# EAGLE board ac-ac-conv_v1.0 (EAGLE 7.3.0)
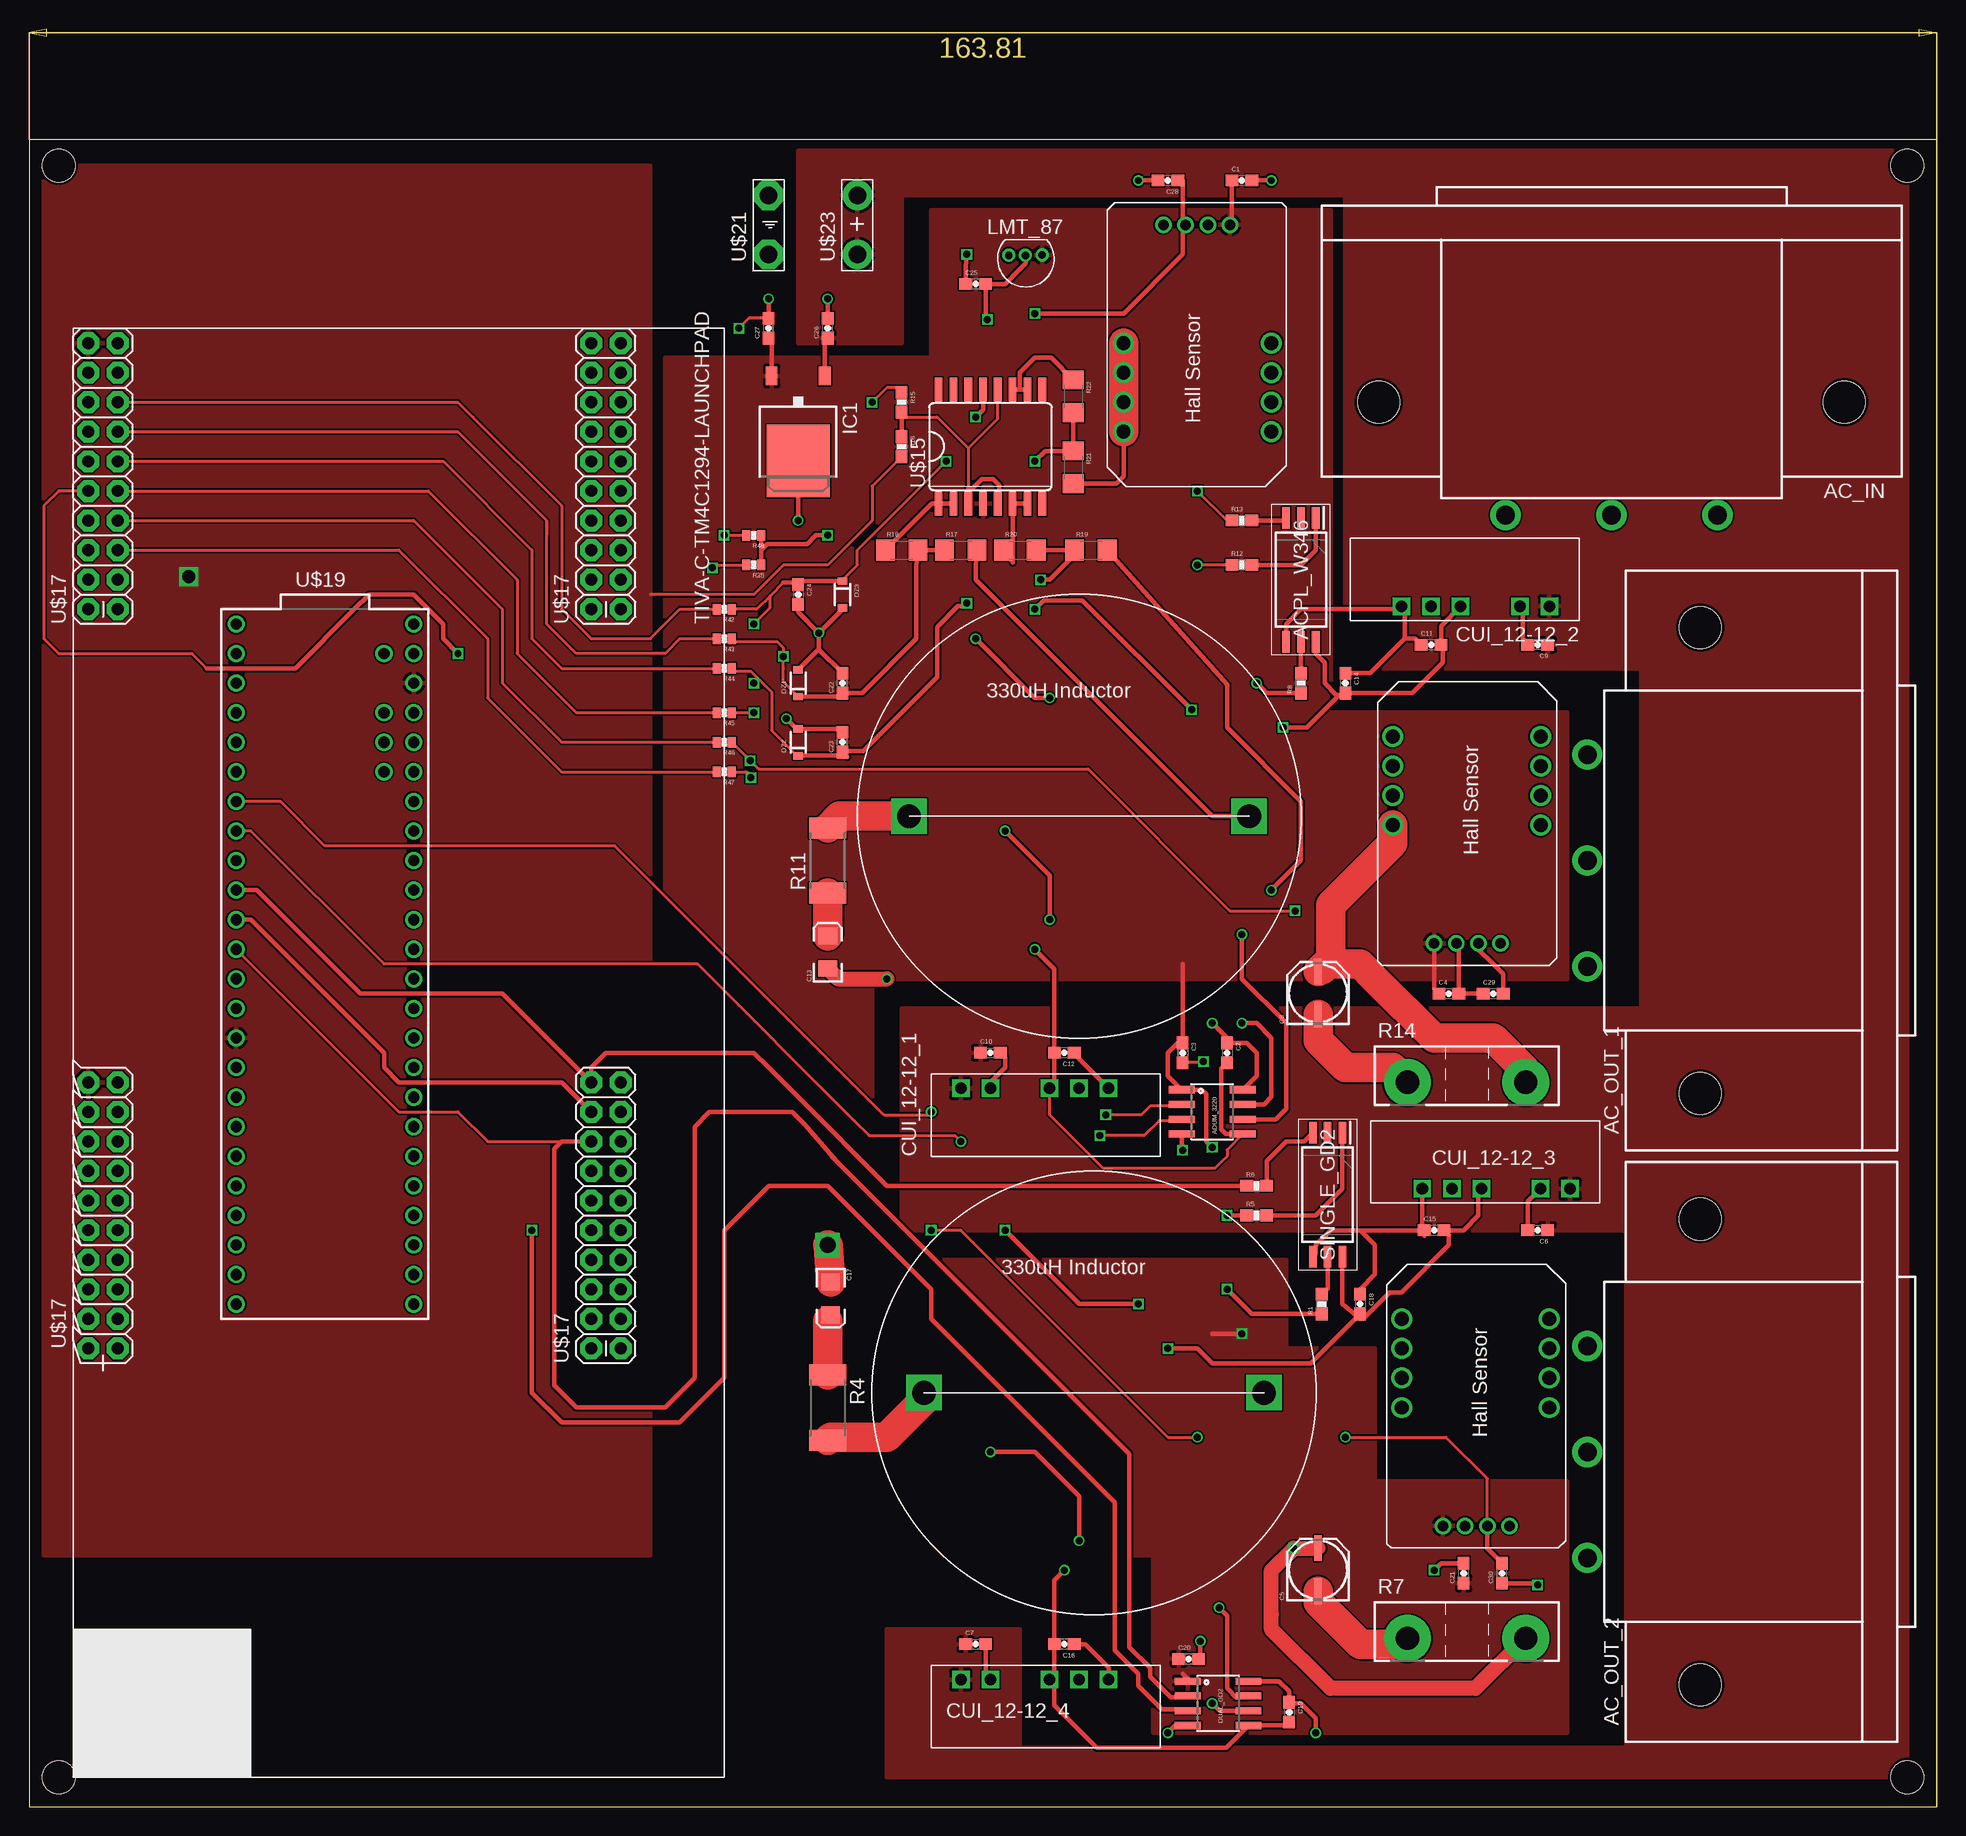
[diagram p0: board, top side]
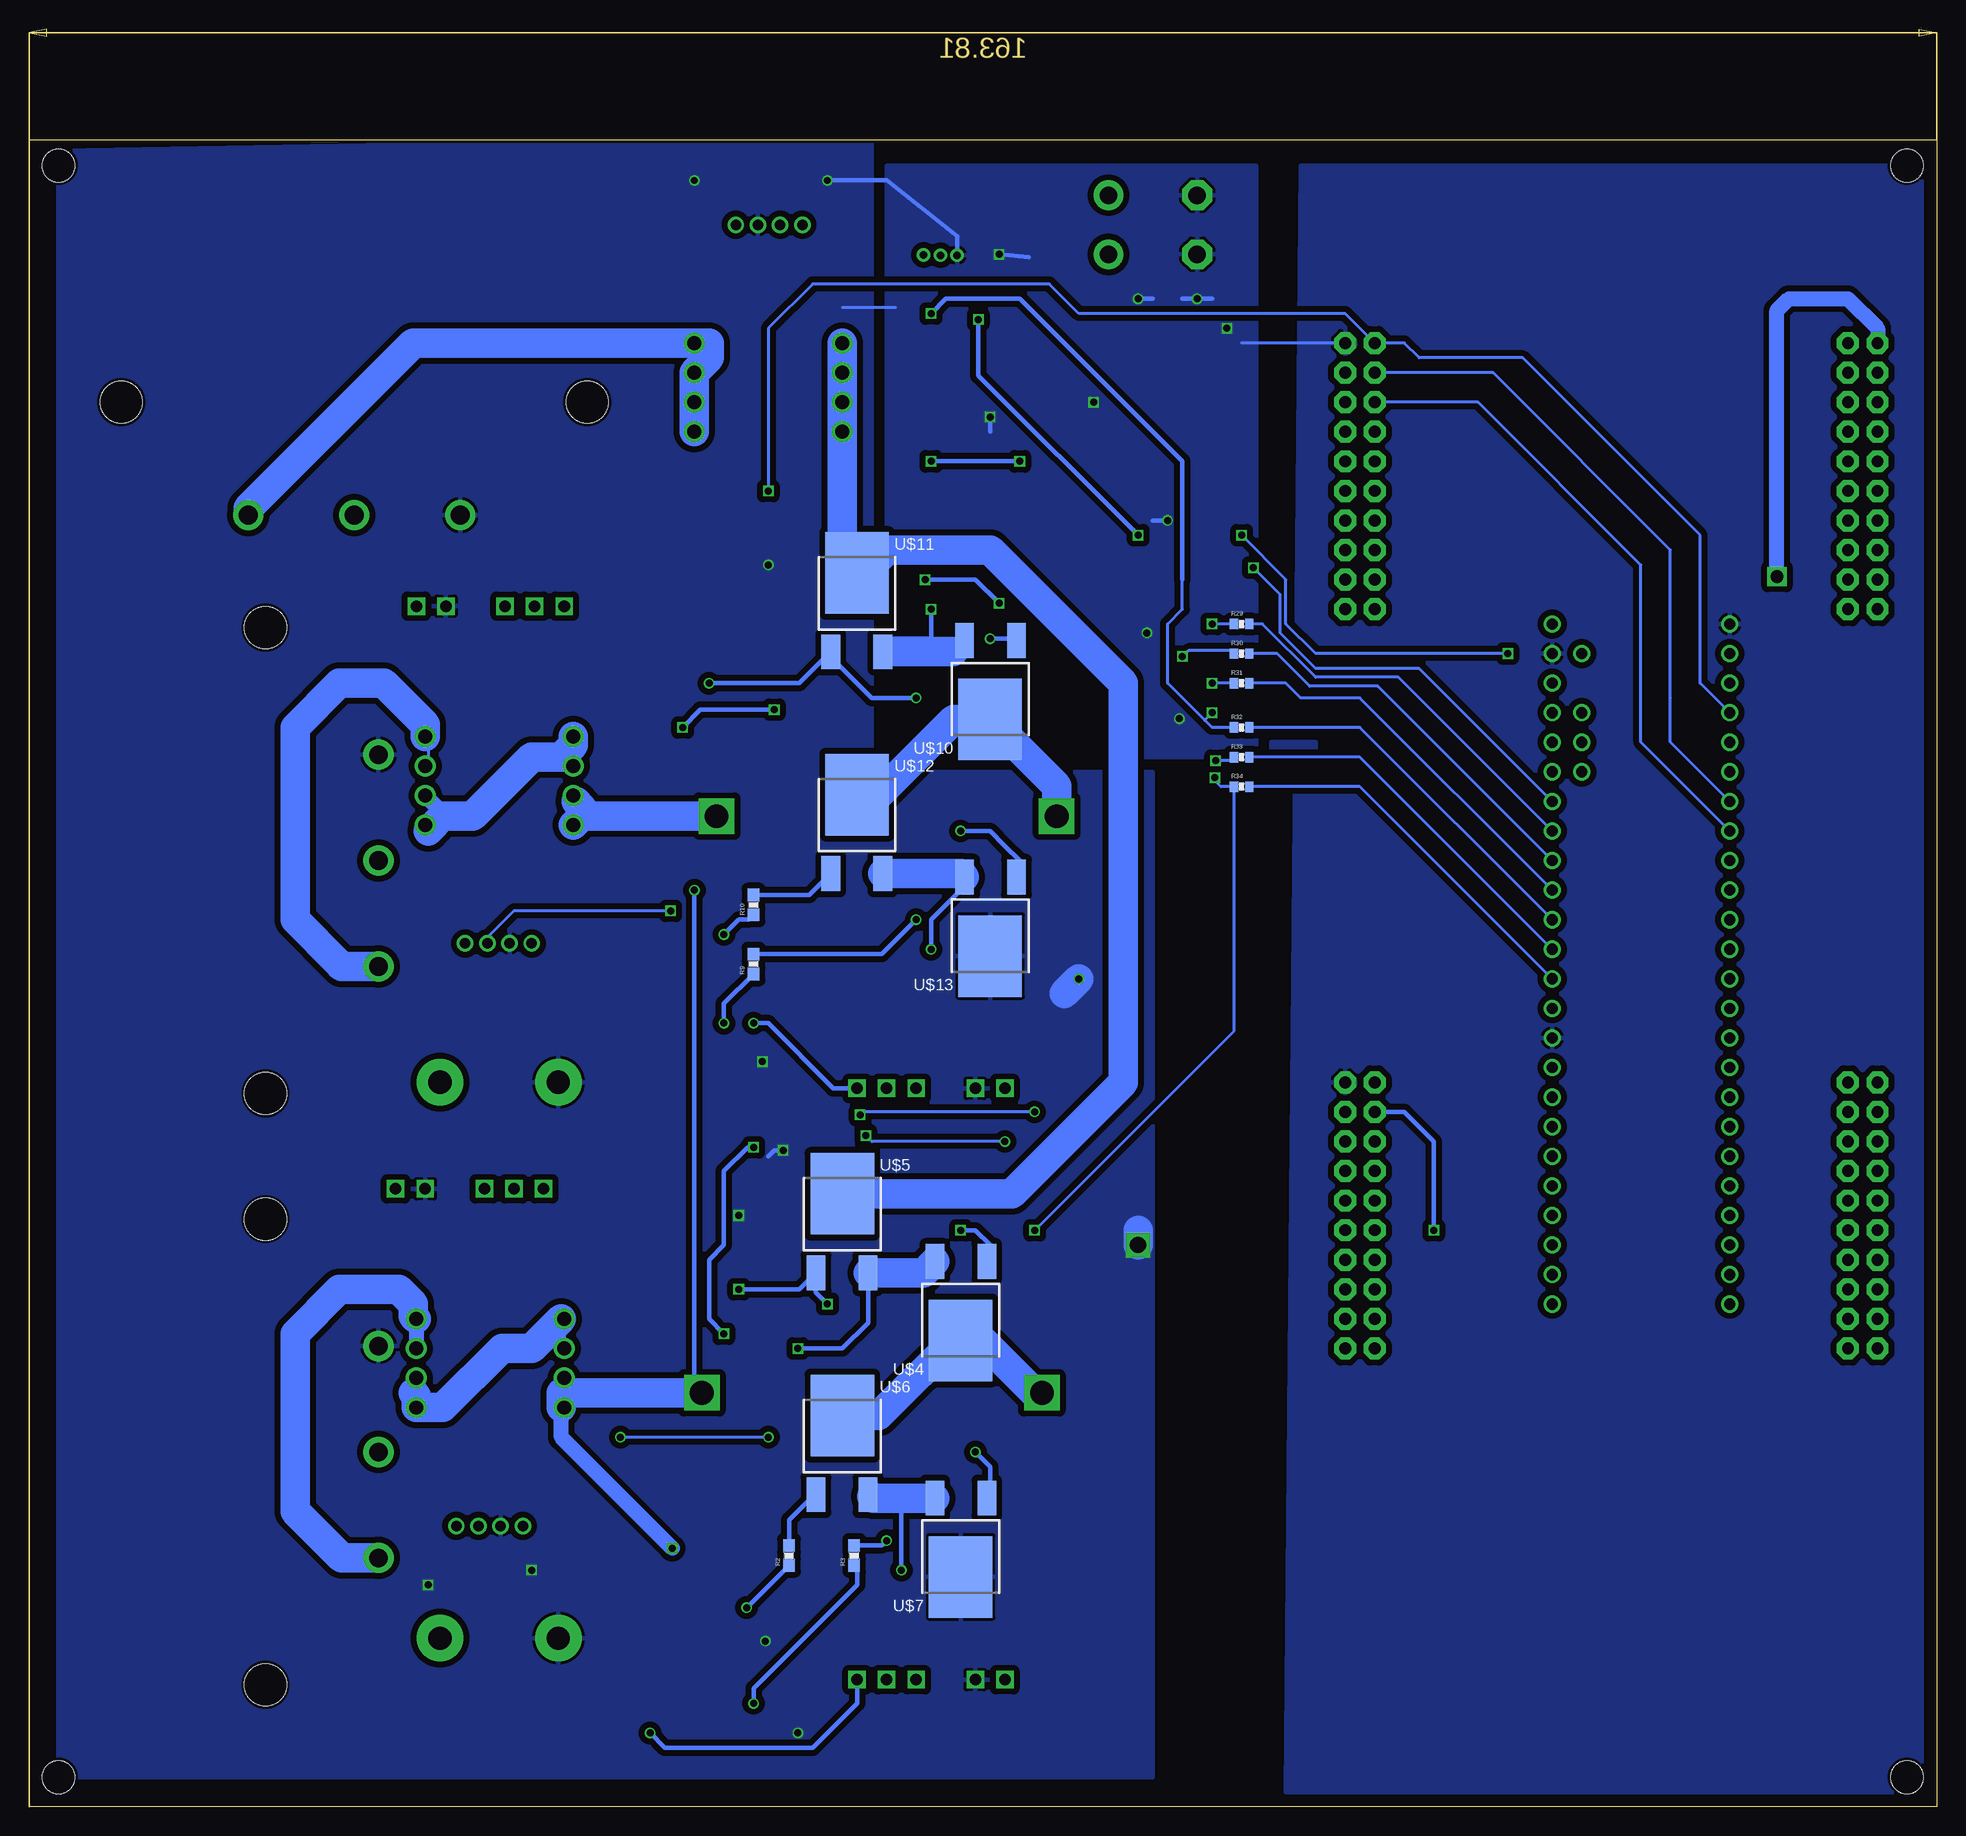
[diagram p1: board, bottom side, seen from below]

Size 163.81 x 143.18 mm. Coordinates in mm from the lower left corner, seen from the top.
Outline: 0,0 163.81,0 163.81,143.18 0,143.18 0,0
Copper layers (1*16): Top 0.035mm / dielectric 1.5mm / Bottom 0.035mm
Design rules "SeeedStudio_2layer_DRU_no_angle_20140221": minimum track width 6mil, minimum drill 12mil, track to track 6mil, track to pad 6mil, pad to pad 6mil, via to via 6mil, smd to smd 0mil, copper to edge 10mil, drill to drill 10mil, minimum pad ring 10mil, minimum via ring 6mil, stop-mask expansion 2mil, vias tented up to drill 100mil, thermal gap 10mil
Net classes: 1 Power: clearance 0.508 mm
Holes 2.8 mm at 161.29,140.97 161.29,2.54 2.54,2.54 2.54,140.97

## Footprints (pad centres in the part's own frame; a part is rotated, then mirrored left to right if it is on the bottom)
6ESRM-P = drill 1.6 pad 2.6: 1 -9.1,9.7; 2 0,9.7; 3 9.1,9.7 | hole 3.6: -20,0; 20,0
SSO-6 = smd 1.85 x 0.65: 1 -5.325,1.778; 2 -5.325,0.508; 3 -5.325,-0.762; 4 5.325,-0.762; 5 5.325,0.508; 6 5.325,1.778
SO08 = smd 0.61 x 2.21: 1 -1.905,-2.616; 2 -0.635,-2.616; 3 0.635,-2.616; 4 1.905,-2.616; 5 1.905,2.616; 6 0.635,2.616; 7 -0.635,2.616; 8 -1.905,2.616
0603-CAP = smd 1.1 x 1: 1 -0.85,0; 2 0.85,0
PANASONIC_C = smd 2.2 x 0.65: + 1.9,-0.2; - -1.8,-0.2
EIA3216 = smd 1.4 x 1.6: A 1.4,0; C -1.4,0
CUI_PDM2 = drill 0.991 square: 1 2.54,5.842; 2 5.08,5.842; 4 10.16,5.842; 5 12.7,5.842; 6 15.24,5.842
SOD-323 = smd 0.63 x 0.83: 1 -1.15,0; 2 1.15,0
F03P_THRU_HOLE = drill 0.9: GND 1.27,8.509; VCC 1.27,10.414; VOUT 1.27,6.604; VREF 1.27,4.699 | drill 1.2: IN2 11.43,13.97; IN3 13.97,13.97; IN4 16.51,13.97; IN5 19.05,13.97; OUT6 19.05,1.27; OUT7 16.51,1.27; OUT8 13.97,1.27; OUT9 11.43,1.27
TO252 = smd 1 x 1.6: 1 -2.28,-4.8; 2 2.28,-4.8 | smd 5.4 x 6.2: 3 0,2.5
BOUNRS_330UH = drill 2.032 square: P$1 14.605,0; P$2 -14.605,0
LMT87_TO = drill 0.635: GND 0.305,-1.346; OUT 1.727,-1.346; VDD 3.175,-1.321
0603-RES = smd 1.1 x 1: 1 -0.85,0; 2 0.85,0
R2512 = smd 1.8 x 3.2: 1 -2.8,0; 2 2.8,0
TO-247-2V = drill 2 pad 4: 1 -5.08,0; 2 5.08,0
1206 = smd 1.6 x 1.8: 1 -1.4,0; 2 1.4,0
0402-RES = smd 0.7 x 0.9: 1 -0.65,0; 2 0.65,0
DPAK = smd 1.6 x 2.997: 1 -2.261,-4.928; 3 2.21,-4.928 | smd 5.452 x 7: 4 0,1.853
SO16L = smd 0.66 x 2.032: 1 -4.445,-4.902; 2 -3.175,-4.902; 3 -1.905,-4.902; 4 -0.635,-4.902; 5 0.635,-4.902; 6 1.905,-4.902; 7 3.175,-4.902; 8 4.445,-4.902; 9 4.445,4.902; 10 3.175,4.902; 11 1.905,4.902; 12 0.635,4.902; 13 -0.635,4.902; 14 -1.905,4.902; 15 -3.175,4.902; 16 -4.445,4.902
TIVA-C-LP-BOOSTER-PACK = drill 1.016 pad 1.88 octagon: 1 36.83,52.07; 2 36.83,54.61; 3 39.37,52.07; 4 39.37,54.61; 5 41.91,52.07; 6 41.91,54.61; 7 44.45,52.07; 8 44.45,54.61; 9 46.99,52.07; 10 46.99,54.61; 11 49.53,52.07; 12 49.53,54.61; 13 52.07,52.07; 14 52.07,54.61; 15 54.61,52.07; 16 54.61,54.61; 17 57.15,52.07; 18 57.15,54.61; 19 59.69,52.07; 20 59.69,54.61; 21 36.83,8.89; 22 36.83,11.43; 23 39.37,8.89; 24 39.37,11.43; 25 41.91,8.89; 26 41.91,11.43; 27 44.45,8.89; 28 44.45,11.43; 29 46.99,8.89; 30 46.99,11.43; 31 49.53,8.89; 32 49.53,11.43; 33 52.07,8.89; 34 52.07,11.43; 35 54.61,8.89; 36 54.61,11.43; 37 57.15,8.89; 38 57.15,11.43; 39 59.69,8.89; 40 59.69,11.43; 41 100.33,8.89; 42 100.33,11.43; 43 102.87,8.89; 44 102.87,11.43; 45 105.41,8.89; 46 105.41,11.43; 47 107.95,8.89; 48 107.95,11.43; 49 110.49,8.89; 50 110.49,11.43; 51 113.03,8.89; 52 113.03,11.43; 53 115.57,8.89; 54 115.57,11.43; 55 118.11,8.89; 56 118.11,11.43; 57 120.65,8.89; 58 120.65,11.43; 59 123.19,8.89; 60 123.19,11.43; 61 100.33,52.07; 62 100.33,54.61; 63 102.87,52.07; 64 102.87,54.61; 65 105.41,52.07; 66 105.41,54.61; 67 107.95,52.07; 68 107.95,54.61; 69 110.49,52.07; 70 110.49,54.61; 71 113.03,52.07; 72 113.03,54.61; 73 115.57,52.07; 74 115.57,54.61; 75 118.11,52.07; 76 118.11,54.61; 77 120.65,52.07; 78 120.65,54.61; 79 123.19,52.07; 80 123.19,54.61
TEENSY_3.5_DIL+4 = drill 0.965: 0 -7.62,26.67; 1 -7.62,24.13; 2 -7.62,21.59; 3 -7.62,19.05; 3.3V 7.62,24.13; 3.3V3 -7.62,-6.35; 4 -7.62,16.51; 5 -7.62,13.97; 6 -7.62,11.43; 7 -7.62,8.89; 8 -7.62,6.35; 9 -7.62,3.81; 10 -7.62,1.27; 11 -7.62,-1.27; 12 -7.62,-3.81; 13 7.62,-3.81; 14/A0 7.62,-1.27; 15/A1 7.62,1.27; 16/A2 7.62,3.81; 17/A3 7.62,6.35; 18/A4 7.62,8.89; 19/A5 7.62,11.43; 20/A6 7.62,13.97; 21/A7 7.62,16.51; 22/A8 7.62,19.05; 23/A9 7.62,21.59; 24 -7.62,-8.89; 25 -7.62,-11.43; 26 -7.62,-13.97; 27 -7.62,-16.51; 28 -7.62,-19.05; 29 -7.62,-21.59; 30 -7.62,-24.13; 31/A12 -7.62,-26.67; 32/A13 -7.62,-29.21; 33/A14 7.62,-29.21; 34/A15 7.62,-26.67; 35/A16 7.62,-24.13; 36/A17 7.62,-21.59; 37/A18 7.62,-19.05; 38/A19 7.62,-16.51; 39/A20 7.62,-13.97; A10 5.08,19.05; A11 5.08,16.51; A21 7.62,-11.43; A22 7.62,-8.89; AGND 7.62,26.67; AREF 5.08,21.59; GND -7.62,29.21; GND1 7.62,-6.35; VIN 7.62,29.21; VUSB 5.08,26.67
SPADE-GROUND = drill 1.5 pad 2.54 octagon: P$1 0,-2.54; P$2 0,2.54
SPADE-POWER = drill 1.5 pad 2.54: P$1 0,-2.54; P$2 0,2.54

## Placement (x,y rotation side)
AC_IN  6ESRM-P  [6ESRM-P]  135.89,120.65 180 top
AC_OUT_1  6ESRM-P  [6ESRM-P]  143.51,81.28 90 top
AC_OUT_2  6ESRM-P  [6ESRM-P]  143.51,30.48 90 top
ACPL_W346  ACPL-W346-SSO6  [SSO-6]  108.71,105.41 270 top
ADUM_3220  ADUM3220  [SO08]  101.6,59.69 270 top
C1  0.1u  [0603-CAP]  104.14,139.7 0 top
C2  1u  [0603-CAP]  102.87,64.77 270 top
C3  0.1u  [0603-CAP]  99.06,64.77 270 top
C4  0.1u  [0603-CAP]  121.92,69.85 0 top
C5  10u  [PANASONIC_C]  110.49,20.32 90 top
C6  2.2u  [0603-CAP]  129.54,49.53 180 top
C7  2.2u  [0603-CAP]  81.28,13.97 0 top
C8  10u  [PANASONIC_C]  110.49,69.85 90 top
C9  2.2u  [0603-CAP]  129.54,99.82 180 top
C10  2.2u  [0603-CAP]  82.55,64.77 0 top
C11  2.2u  [0603-CAP]  120.4,99.82 0 top
C12  2.2u  [0603-CAP]  88.9,64.77 180 top
C13  10n  [EIA3216]  68.58,73.41 90 top
C14  1u  [0603-CAP]  113.03,96.52 270 top
C15  2.2u  [0603-CAP]  120.65,49.53 0 top
C16  2.2u  [0603-CAP]  88.9,13.97 180 top
C17  1n  [EIA3216]  68.83,43.69 270 top
C18  1u  [0603-CAP]  114.3,43.18 270 top
C19  1u  [0603-CAP]  108.2,8.13 270 top
C20  0.1u  [0603-CAP]  99.57,12.7 0 top
C21  0.1u  [0603-CAP]  123.19,20.07 90 top
C22  0.1u  [0603-CAP]  69.85,96.52 90 top
C23  0.1u  [0603-CAP]  69.85,91.44 90 top
C24  0.1u  [0603-CAP]  66.04,104.14 270 top
C25  0.1u  [0603-CAP]  81.28,130.81 0 top
C26  0.1u  [0603-CAP]  68.58,127 90 top
C27  0.1u  [0603-CAP]  63.5,127 90 top
C28  0.1u  [0603-CAP]  97.79,139.7 180 top
C29  0.1u  [0603-CAP]  125.73,69.85 0 top
C30  0.1u  [0603-CAP]  126.49,20.07 90 top
CUI_12-12_1  CUI-S12-S12  [CUI_PDM2]  77.47,55.88 0 top
CUI_12-12_2  CUI-S12-S12  [CUI_PDM2]  133.1,108.97 180 top
CUI_12-12_3  CUI-S12-S12  [CUI_PDM2]  134.87,58.93 180 top
CUI_12-12_4  CUI-S12-S12  [CUI_PDM2]  77.47,5.08 0 top
DUAL_GD2  ADUM3220  [SO08]  102.11,8.89 270 top
DZ1  DIODE-ZENER-BZT52  [SOD-323]  66.04,96.52 90 top
DZ2  DIODE-ZENER-BZT52  [SOD-323]  66.04,91.44 90 top
DZ3  DIODE-ZENER-BZT52  [SOD-323]  69.85,104.14 270 top
I_SENSE_1  F03PS05  [F03P_THRU_HOLE]  92.71,137.16 270 top
I_SENSE_2  F03PS05  [F03P_THRU_HOLE]  131.06,72.9 90 top
I_SENSE_3  F03PS05  [F03P_THRU_HOLE]  131.83,22.86 90 top
IC1  7805DT  [TO252]  66.04,118.11 180 top
L1  L330UH  [BOUNRS_330UH]  91.44,35.56 180 top
L2  L330UH  [BOUNRS_330UH]  90.17,85.09 180 top
LMT_87  LMT87_PAC  [LMT87_TO]  83.82,134.62 0 top
R1  100  [0603-RES]  111,43.18 90 top
R2  [0603-RES]  98.55,21.59 90 bottom
R3  [0603-RES]  92.96,21.59 90 bottom
R4  10k  [R2512]  68.58,34.29 270 top
R5  100  [0603-RES]  105.41,50.8 0 top
R6  330  [0603-RES]  105.41,53.34 0 top
R7  50  [TO-247-2V]  123.44,14.48 0 top
R8  100  [0603-RES]  109.22,96.52 90 top
R9  100  [0603-RES]  101.6,72.39 90 bottom
R10  100  [0603-RES]  101.6,77.47 90 bottom
R11  100k  [R2512]  68.58,81.28 90 top
R12  100  [0603-RES]  104.14,106.68 0 top
R13  330  [0603-RES]  104.14,110.49 0 top
R14  50  [TO-247-2V]  123.44,62.23 0 top
R15  10k  [0603-RES]  74.93,120.65 270 top
R16  10k  [0603-RES]  74.93,116.84 270 top
R17  100k  [1206]  80.01,107.95 0 top
R18  1.2k  [1206]  74.93,107.95 0 top
R19  100k  [1206]  91.19,107.95 0 top
R20  1.2k  [1206]  85.09,107.95 0 top
R21  100k  [1206]  89.66,115.06 270 top
R22  1.2k  [1206]  89.66,121.16 270 top
R29  [0402-RES]  59.69,101.6 0 bottom
R30  [0402-RES]  59.69,99.06 0 bottom
R31  [0402-RES]  59.69,96.52 0 bottom
R32  [0402-RES]  59.69,92.71 0 bottom
R33  [0402-RES]  59.69,90.17 0 bottom
R34  [0402-RES]  59.69,87.63 0 bottom
R35  [0402-RES]  62.23,106.68 180 top
R42  [0402-RES]  59.69,102.87 180 top
R43  [0402-RES]  59.69,100.33 180 top
R44  [0402-RES]  59.69,97.79 180 top
R45  [0402-RES]  59.69,93.98 180 top
R46  [0402-RES]  59.69,91.44 180 top
R47  [0402-RES]  59.69,88.9 180 top
R48  [0402-RES]  62.23,109.22 180 top
SINGLE_GD2  ACPL-W346-SSO6  [SSO-6]  111,52.58 270 top
U$4  IPD60R280P  [DPAK]  83.82,41.91 180 bottom
U$5  IPD60R280P  [DPAK]  93.98,50.8 0 bottom
U$6  IPD60R280P  [DPAK]  93.98,31.75 0 bottom
U$7  IPD60R280P  [DPAK]  83.82,21.59 180 bottom
U$10  IPD60R280P  [DPAK]  81.28,95.25 180 bottom
U$11  IPD60R280P  [DPAK]  92.71,104.14 0 bottom
U$12  IPD60R280P  [DPAK]  92.71,85.09 0 bottom
U$13  IPD60R280P  [DPAK]  81.28,74.93 180 bottom
U$15  LT1014  [SO16L]  82.55,116.84 0 top
U$17  TM4C1294_SHIELD  [TIVA-C-LP-BOOSTER-PACK]  59.69,2.54 90 top
U$19  TEENSY_3.5_DIL+4  [TEENSY_3.5_DIL+4]  25.4,72.39 0 top
U$21  SPADE-GROUND  [SPADE-GROUND]  63.5,135.89 0 top
U$23  SPADE-POWER  [SPADE-POWER]  71.12,135.89 0 top

## Library data of the parts
AC_IN AC_OUT_1 AC_OUT_2 = con-tycoelectronics; MF: TYCO ELECTRONICS; MPN: 6ESRM-P; OC_FARNELL: unknown; OC_NEWARK: 87F1821
ACPL_W346 ADUM_3220 CUI_12-12_1-CUI_12-12_4 DUAL_GD2 I_SENSE_1-I_SENSE_3 L1 L2 SINGLE_GD2 U$4-U$7 U$10-U$13 U$17 = Francis-Project
C1-C30 DZ1-DZ3 R1-R3 R5 R6 R8-R10 R12 R13 R15-R22 R29-R35 R42-R48 = SparkFun
IC1 = linear
LMT_87 = nick
R4 R11 = SparkFun-Passives
R7 R14 = resistor-power; OC_FARNELL: unknown; OC_NEWARK: unknown
U$15 = SparkFun-AnalogIC
U$19 = Teensy_3_and_LC_Series_Boards_v1.4
U$21 U$23 = Spade-terminals

## Nets
1V6: R15.2 R16.1 U$15.3 U$15.5 U$15.12
3V3: R16.2 U$17.20 U$17.80 U$19.3.3V U$19.3.3V3
5V: ADUM_3220.1 C1.1 C3.1 C4.1 C20.1 C21.1 C27.1 DUAL_GD2.1 I_SENSE_1.VCC I_SENSE_2.VCC I_SENSE_3.VCC IC1.2 LMT_87.VDD U$15.4
+12V: C6.1 C7.1 C9.1 C10.1 C26.1 CUI_12-12_1.1 CUI_12-12_2.1 CUI_12-12_3.1 CUI_12-12_4.1 IC1.1 U$23.P$1 U$23.P$2
+IN: U$15.14
-IN: U$15.15
AREF: U$19.AREF
GND [Power]: AC_IN.3 AC_OUT_1.3 AC_OUT_2.3 ADUM_3220.4 C1.2 C3.2 C4.2 C5.- C6.2 C7.2 C8.- C9.2 C10.2 C13.C C17.C C20.2 C21.2 C22.2 C23.2 C24.2 C25.1 C26.2 C27.2 C28.2 C29.1 C30.1 CUI_12-12_1.2 CUI_12-12_2.2 CUI_12-12_3.2 CUI_12-12_4.2 DUAL_GD2.4 DZ1.2 DZ2.2 DZ3.2 I_SENSE_1.GND I_SENSE_2.GND I_SENSE_3.GND IC1.3 LMT_87.GND R5.1 R7.1 R12.1 R14.1 R15.1 U$7.4 U$13.4 U$15.13 U$17.39 U$17.59 U$19.AGND U$19.GND U$19.GND1 U$21.P$1 U$21.P$2
HI_G1 [Power]: R8.1 U$10.1 U$11.1
HI_G2: R1.1 U$4.1 U$5.1
HI_PS1: ACPL_W346.4 C11.1 C14.1 CUI_12-12_2.6
HI_PS2: C15.1 C18.1 CUI_12-12_3.6 SINGLE_GD2.4
HI_S1: ACPL_W346.6 C11.2 C14.2 CUI_12-12_2.4 U$10.3 U$11.3
HI_S2 [Power]: C15.2 C18.2 CUI_12-12_3.4 SINGLE_GD2.6 U$4.3 U$5.3
I_APP1: C29.2 I_SENSE_2.VOUT R33.1 R46.1
I_APP2: C30.2 I_SENSE_3.VOUT R34.1 R47.1
I_MAIN: C28.1 I_SENSE_1.VOUT R32.1 R45.1
LO_G1+: R9.2 U$13.1
LO_G1-: R10.2 U$12.1
LO_G2+: R3.2 U$7.1
LO_G2-: R2.2 U$6.1
LO_PS1: ADUM_3220.8 C2.1 C12.1 CUI_12-12_1.6
LO_PS2: C16.1 C19.1 CUI_12-12_4.6 DUAL_GD2.8
LO_S1 [Power]: ADUM_3220.5 C2.2 C12.2 CUI_12-12_1.4 U$12.3 U$13.3
LO_S2 [Power]: C16.2 C19.2 CUI_12-12_4.4 DUAL_GD2.5 U$6.3 U$7.3
N$1 [Power]: AC_IN.1 I_SENSE_1.IN2 I_SENSE_1.IN3 I_SENSE_1.IN4 I_SENSE_1.IN5
N$2 [Power]: I_SENSE_2.IN4 I_SENSE_2.IN5 I_SENSE_2.OUT8 I_SENSE_2.OUT9
N$3 [Power]: I_SENSE_3.IN4 I_SENSE_3.IN5 I_SENSE_3.OUT8 I_SENSE_3.OUT9
N$4 [Power]: AC_OUT_1.1 I_SENSE_2.OUT6 I_SENSE_2.OUT7
N$5 [Power]: L1.P$1 R4.2 U$4.4 U$6.4
N$6 [Power]: C17.A R4.1
N$7: R5.2 SINGLE_GD2.1
N$8: R6.2 SINGLE_GD2.3
N$9 [Power]: L2.P$1 R11.2 U$10.4 U$12.4
N$10 [Power]: AC_OUT_2.1 I_SENSE_3.OUT6 I_SENSE_3.OUT7
N$11 [Power]: C13.A R11.1
N$12: ACPL_W346.1 R12.2
N$13: ACPL_W346.3 R13.2
N$14 [Power]: ADUM_3220.7 R9.1
N$15: R18.1 U$15.1 U$15.2
N$16: R34.2 U$19.14/A0
N$17: R22.1 U$15.10 U$15.11
N$18: R33.2 U$19.15/A1
N$19: R20.1 U$15.6 U$15.7
N$20: R32.2 U$19.16/A2
N$21: R31.2 U$19.17/A3
N$23 [Power]: ADUM_3220.6 R10.1
N$24 [Power]: DUAL_GD2.7 R2.1
N$25: R30.2 U$19.18/A4
N$26 [Power]: DUAL_GD2.6 R3.1
N$27: R29.2 U$19.19/A5
N$41: R35.2 U$19.20/A6
N$55: R42.2 U$17.75
N$56: R43.2 U$17.73
N$57: R44.2 U$17.71
N$58: R45.2 U$17.69
N$59: R46.2 U$17.67
N$60: R47.2 U$17.65
N$61: R48.2 U$17.70
OUT: U$15.16
PWM_H1: R13.1 U$17.60 U$19.2
PWM_H2: R6.1 U$17.40 U$19.8
PWM_L1+: ADUM_3220.2 U$17.58 U$19.5
PWM_L1-: ADUM_3220.3 U$17.56 U$19.6
PWM_L2+: DUAL_GD2.3 U$17.38 U$19.9
PWM_L2-: DUAL_GD2.2 U$17.36 U$19.10
TEMP: C25.2 LMT_87.OUT R35.1 R48.1
V_APP1: C22.1 DZ1.1 R17.1 R18.2 R30.1 R43.1
V_APP2: C23.1 DZ2.1 R19.1 R20.2 R31.1 R44.1
V_MAIN: C24.1 DZ3.1 R21.1 R22.2 R29.1 R42.1
VBUS [Power]: I_SENSE_1.OUT6 I_SENSE_1.OUT7 I_SENSE_1.OUT8 I_SENSE_1.OUT9 R21.2 U$5.4 U$11.4
VIN: U$19.VIN
VOUT1 [Power]: C8.+ I_SENSE_2.IN2 I_SENSE_2.IN3 L2.P$2 R14.2 R17.2
VOUT2 [Power]: C5.+ I_SENSE_3.IN2 I_SENSE_3.IN3 L1.P$2 R7.2 R19.2
VOUT_H1: R1.2 SINGLE_GD2.5
VOUT_H2: ACPL_W346.5 R8.2
VUSB: U$19.VUSB

## Tracks (layer width: path | path; a pad name or v marks a point on that pad's centre or on a via)
1V6
  Top 0.254: R15.2 75.35,119.38 77.98,119.38 80.64,116.71 | 80.64,116.71 80.64,113.28 U$15.3 | 80.64,116.71 83.19,119.25 U$15.12
  Top 0.406: R16.1 R15.2 | U$15.5 83.31,112.06 83.31,113.54 82.8,114.05 81.79,114.05 81.03,113.28 80.64,113.28
3V3  (via drill 1.1)
  Top 0.254: R16.2 72.39,113.45 72.39,110.49 68.58,106.68 64.77,106.68 62.23,104.14 53.34,104.14
  Bottom 1.27: v13.72,105.66 13.72,128.52 12.7,129.54 7.62,129.54 5.08,127 U$17.80
  pour Top: 1.27,140.97 53.34,140.97 53.34,21.59 1.27,21.59
5V  (via drill 0.6)
  Top 0.406: I_SENSE_1.VCC 102.87,136.14 103.29,136.56 C1.1 | IC1.2 63.76,125.89 C27.1 | I_SENSE_2.VCC 120.65,70.27 C4.1 | DUAL_GD2.1 99.49,11 | 99.49,11 99.06,11.43 99.49,11 | 99.06,72.39 C3.1 98.64,65.62 97.79,64.77 97.79,62.79 ADUM_3220.1 100.71,61.59 101.09,61.21 101.09,57.15 v101.6,56.64 | v104.14,40.64 101.6,40.64
  Bottom 0.406: v101.6,56.64 102.11,56.64 104.14,54.61 104.14,48.26 105.41,46.99 105.41,41.91 v104.14,40.64
  pour Top: 54.61,124.46 77.47,124.46 77.47,137.16 111.76,137.16 111.76,93.98 132.08,93.98 132.08,71.12 72.39,71.12 72.39,46.99 107.95,46.99 107.95,39.37 115.57,39.37 115.57,27.94 132.08,27.94 132.08,6.35 96.52,6.35 96.52,21.59 54.61,21.59
+12V
  Top 0.406: IC1.1 68.32,125.89 C26.1
  pour Top: 113.03,138.43 113.03,97.79 138.43,97.79 138.43,68.58 74.93,68.58 74.93,49.53 137.16,49.53 137.16,5.08 85.09,5.08 85.09,15.24 73.66,15.24 73.66,2.54 161.29,2.54 161.29,142.24 66.04,142.24 66.04,125.73 74.93,125.73 74.93,138.43
GND  (via drill 0.6, 1.4)
  Top 0.254: R15.1 74.51,121.92 73.66,121.92 v72.39,120.65 | v100.84,64.01 100.75,63.92 C3.2 | R12.1 101.6,106.68 v100.33,106.68 | C27.2 61.81,127.85 v60.96,127
  Top 0.406: C21.2 121.25,20.92 v120.65,20.32 | C30.1 129.37,19.22 v129.54,19.05 | C27.2 v63.5,129.54 | C26.2 v68.58,129.54 | IC1.3 v66.04,110.49 | C9.2 128.69,99.91 128.27,100.33 128.27,102.87 CUI_12-12_2.2 | I_SENSE_2.GND 122.77,73.95 C4.2 C29.1 | C6.2 128.69,51.98 CUI_12-12_3.2 | CUI_12-12_4.2 82.13,11.34 C7.2 | C20.2 100.58,13.21 v100.58,14.22 | DUAL_GD2.4 98.42,6.99 v97.79,6.35 | CUI_12-12_1.2 82.55,62.23 83.82,63.5 83.82,64.35 C10.2 | C25.1 80.43,132.25 v80.52,133.35 | U$15.13 81.92,120.02 v81.28,119.38 | 118.11,15.24 118.36,14.99 R7.1 118.11,14.22 118.11,13.97 | ADUM_3220.4 98.98,56.46 v99.06,56.39 | R5.1 v102.87,50.8 | DZ3.2 69.85,102.87 v67.82,100.84 | C24.2 66.04,102.62 v67.82,100.84 | DZ1.2 67.82,99.45 67.82,100.33 | 67.82,100.33 v67.82,100.84 | C22.2 67.82,99.4 67.82,100.33 | C23.2 69.55,92.59 DZ2.2 65.91,92.59 v65.02,93.47 65.02,93.61 | C28.2 v95.25,139.7 | C1.2 v106.68,139.7
  Top 1.27: C13.C 69.47,71.12 v73.66,71.12
  Top 2.54: C5.- 110.69,17.58 114.3,13.97 118.11,13.97 | C8.- 110.69,65.84 113.03,63.5 117.09,63.5 R14.1 | C17.C 68.63,48.21 v68.58,48.26
  Bottom 0.254: U$17.59 59.69,125.73 | 89.41,128.78 93.98,128.78
  Bottom 0.406: LMT_87.GND 84.12,134.93 90.17,139.7 v95.25,139.7 | 64.77,129.54 v63.5,129.54 62.23,129.54 | v68.58,129.54 67.31,129.54 | v66.04,110.49 67.31,110.49 | v100.58,14.22 100.58,14.48 | v80.52,133.35 77.98,133.1 | v81.28,119.38 81.28,118.11 | v99.06,56.39 99.82,56.39 100.33,55.88
  Bottom 2.54: v68.58,48.26 68.58,49.53 | v73.66,71.12 74.93,69.85
  pour Bottom: 67.31,88.9 91.44,88.9 91.44,143.51 161.29,142.24 161.29,2.54 67.31,2.54
  pour Bottom: 58.42,140.97 90.17,140.97 90.17,99.06 73.66,99.06 73.66,90.17 58.42,90.17
  pour Bottom: 1.27,140.97 54.61,140.97 55.88,1.27 1.27,1.27
  pour Bottom: 57.15,91.44 53.34,91.44 53.34,90.17 57.15,90.17
HI_G1  (via drill 0.6)
  Top 0.406: R8.1 106.26,95.67 v105.41,96.52 | v87.63,95.25 86.36,95.25 v81.28,100.33
  Bottom 0.406: v105.41,96.52 97.66,96.52 U$11.1 94.97,98.78 91.44,95.25 v87.63,95.25 | v81.28,100.33 79.17,100.33 U$10.1
HI_G2  (via drill 0.6)
  Top 0.406: R1.1 104.99,42.33 v102.87,44.45 | v95.25,43.18 90.17,43.18 v83.82,49.53
  Bottom 0.406: v102.87,44.45 97.66,44.45 U$5.1 96.24,44.17 v95.25,43.18 | v83.82,49.53 82.55,49.53 81.28,48.26 81.28,47.12 U$4.1
HI_PS1
  Top 0.406: C14.1 115.15,97.37 118.11,100.33 | 118.11,100.33 119.04,100.33 C11.1 | 118.11,100.33 118.11,102.87 CUI_12-12_2.6 117.6,102.87 109.22,102.87 107.95,101.6 ACPL_W346.4
HI_PS2
  Top 0.406: CUI_12-12_3.6 119.63,49.7 C15.1 | C15.1 114.3,49.53 | 114.3,49.53 111.76,49.53 110.49,48.26 110.49,47.51 SINGLE_GD2.4 | 119.8,49.02 C15.1 | C18.1 114.3,44.45 115.57,45.72 115.57,48.26 114.3,49.53
HI_S1  (via drill 0.6)
  Top 0.406: CUI_12-12_2.4 121.25,101.43 C11.2 121.41,99.66 121.41,98.3 118.78,95.67 C14.2 112.86,95.5 112.52,95.5 | ACPL_W346.6 110.49,99.06 111.25,98.3 111.25,96.52 112.27,95.5 112.52,95.5 | v86.36,102.87 87.12,103.63 90.42,103.63 v99.82,94.23 | v107.7,92.71 109.73,92.71 112.52,95.5
  Bottom 0.254: 89.92,99.31 90.4,99.31 U$11.3 | 84.45,99.21 U$10.3
  Bottom 0.406: U$11.3 89.38,100.33 86.36,100.33 v86.36,102.87 | v99.82,94.23 106.17,94.23 v107.7,92.71
  Bottom 2.54: 84.45,99.21 89.81,99.21 89.92,99.31
HI_S2  (via drill 0.6)
  Top 0.406: CUI_12-12_3.4 124.46,52.83 124.46,50.8 123.19,49.53 C15.2 121.92,49.11 121.92,48.26 117.86,44.2 116.84,44.2 114.55,41.91 114.3,41.91 | SINGLE_GD2.6 112.78,47 112.78,43.18 114.3,41.91 | 114.3,41.91 114.72,42.33 114.47,42.33 | 114.47,42.33 C18.2 | 114.47,42.33 C18.2 | v97.79,39.37 100.33,39.37 101.6,38.1 110.07,38.1 C18.2 | 114.47,42.33 114.47,42.08 114.3,41.91
  Bottom 0.406: U$5.3 91.77,41.58 93.98,39.37 v97.79,39.37
  Bottom 2.54: U$5.3 87,45.87 U$4.3
I_APP1  (via drill 0.6)
  Top 0.254: R46.1 v61.92,89.86 | v61.92,89.86 62.55,89.22 | 62.55,89.22 62.63,89.15 90.93,89.15 103.12,76.96 v108.71,76.96 | v61.92,89.86 62.55,89.22
  Top 0.406: C29.2 126.58,71.54 125.73,72.39 124.46,73.66 I_SENSE_2.VOUT
  Bottom 0.254: v108.71,76.96 122.17,76.96 124.46,74.68 I_SENSE_2.VOUT | R33.1 60.65,89.86 v61.92,89.86
I_APP2  (via drill 0.6)
  Top 0.254: I_SENSE_3.VOUT 125.22,28.19 121.67,31.75 v113.03,31.75 | v77.47,49.53 80.01,49.53 97.79,31.75 v100.33,31.75 | R47.1 61.47,88.9 arc-90 v61.98,88.39
  Top 0.406: I_SENSE_3.VOUT 125.22,22.19 C30.2
  Bottom 0.254: v77.47,49.53 60.34,66.66 R34.1 61.47,87.63 61.98,88.14 v61.98,88.39 | v100.33,31.75 v113.03,31.75
I_MAIN  (via drill 0.6)
  Top 0.254: R45.1 v62.23,93.98
  Top 0.406: I_SENSE_1.VOUT 99.06,136.14 | 99.06,136.14 99.06,139.7 C28.1 | 99.06,136.14 99.06,133.35 93.98,128.27 v86.36,128.27
  Bottom 0.254: R32.1 62.23,92.71 62.87,93.34 | 62.87,93.34 66.04,96.52 66.04,101.6 64.77,102.87 64.77,105.41 | v62.23,93.98 62.87,93.34
  Bottom 0.406: v86.36,128.27 85.09,129.54 83.82,129.54 78.74,129.54 64.77,115.57 64.77,105.41
LO_G1+  (via drill 0.6)
  Top 0.406: v87.63,76.2 87.63,80.01 v83.82,83.82
  Bottom 0.406: R9.2 90.59,73.24 v87.63,76.2 | v83.82,83.82 81.28,83.82 80.01,82.55 78.74,81.28 78.74,80.14 U$13.1
LO_G1-
  Bottom 0.406: R10.2 96.81,78.32 U$12.1
LO_G2+  (via drill 0.6)
  Top 0.406: v90.17,22.86 90.17,26.67 86.36,30.48 v82.55,30.48
  Bottom 0.406: R3.2 90.59,22.44 v90.17,22.86 | v82.55,30.48 81.28,29.21 81.28,26.8 U$7.1
LO_G2-
  Bottom 0.406: R2.2 98.55,24.64 96.52,26.67 96.39,26.67 U$6.1
LO_PS1  (via drill 0.6)
  Top 0.406: ADUM_3220.8 105.41,62.79 105.41,64.77 104.56,65.62 C2.1 102.87,66.04 v101.6,67.31 | C12.1 89.75,64.68 CUI_12-12_1.6
  Bottom 0.406: CUI_12-12_1.6 94.74,61.72 100.33,67.31 v101.6,67.31
LO_PS2  (via drill 0.6)
  Top 0.406: C16.1 90.68,13.97 92.71,11.94 CUI_12-12_4.6 | DUAL_GD2.8 107.31,10.79 108.2,9.91 C19.1 108.29,8.89 109.22,8.89 110.49,7.62 v110.49,6.35
  Bottom 0.406: CUI_12-12_4.6 92.71,8.89 96.52,5.08 109.22,5.08 v110.49,6.35
LO_S1  (via drill 0.6)
  Top 0.254: ADUM_3220.5 102.87,56.44 102.87,55.88 102.36,55.37 101.85,54.86 92.2,54.86 91.69,55.37 87.63,59.44 CUI_12-12_1.4
  Top 0.406: CUI_12-12_1.4 88.05,62.14 C12.2 88.05,71.97 v86.36,73.66 | ADUM_3220.5 103.5,57.78 102.74,57.78 102.36,58.17 102.36,58.93 102.36,63.41 C2.2
  Bottom 0.406: v86.36,73.66 86.36,76.2 83.82,78.74 83.82,79.53 U$13.3
  Bottom 2.54: U$12.3 83.8,80.16 U$13.3
LO_S2  (via drill 0.6)
  Top 0.406: 88.05,11.34 CUI_12-12_4.4 88.05,11.34 | 88.05,11.34 C16.2 88.05,19.47 v88.9,20.32 | C19.2 107.91,6.99 DUAL_GD2.5 102.82,5.08 91.69,5.08 88.05,8.72 88.05,11.34
  Bottom 0.406: U$6.3 91.59,26.82 91.44,26.67 | v88.9,20.32 88.9,26.52
  Bottom 2.54: U$7.3 88.9,26.52 91.29,26.52 91.44,26.67
N$1
  Bottom 2.54: AC_IN.1 144.99,111.55 130.81,125.73 I_SENSE_1.IN2 | I_SENSE_1.IN2 105.41,125.73 | 105.41,125.73 105.41,124.46 I_SENSE_1.IN3 I_SENSE_1.IN4 | I_SENSE_1.IN4 106.68,119.38 | I_SENSE_1.IN4 I_SENSE_1.IN5 | I_SENSE_1.IN2 105.41,125.73
N$2
  Bottom 0.254: 121.41,89.41 I_SENSE_2.IN4
  Bottom 0.406: I_SENSE_2.OUT9 129.79,84.07 129.54,83.82
  Bottom 1.27: 128.27,85.09 128.27,85.34 I_SENSE_2.OUT8
  Bottom 2.54: 129.54,83.82 128.27,85.09 125.73,85.09 121.41,89.41 120.65,90.17 118.11,90.17 117.09,91.19 I_SENSE_2.IN5
N$3
  Bottom 0.254: I_SENSE_3.IN4 I_SENSE_3.IN5 118.11,41.91
  Bottom 1.27: 130.81,35.56 130.81,36.58 I_SENSE_3.OUT8
  Bottom 2.54: 130.81,35.56 130.56,35.31 I_SENSE_3.OUT9 128.27,34.29 123.19,39.37 120.65,39.37 118.11,41.91
N$4
  Bottom 0.254: I_SENSE_2.OUT6 129.79,91.69 129.54,91.44 129.54,89.66 I_SENSE_2.OUT7
  Bottom 2.54: 129.79,92.71 I_SENSE_2.OUT6 129.79,92.71 | 129.79,92.71 129.79,92.96 133.35,96.52 137.16,96.52 140.97,92.71 140.97,76.2 137.16,72.39 136.95,72.18 AC_OUT_1.1
N$5
  Top 2.54: L1.P$1 76.83,34.92 73.66,31.75 68.84,31.75 R4.2
  Bottom 0.254: 77.47,35.56 L1.P$1 | U$4.4 83.82,40.64
  Bottom 2.54: U$4.4 81.97,40.06 77.47,35.56 | U$6.4 90.86,33.6 83.82,40.64
N$6
  Top 0.406: C17.A 68.83,41.99 68.58,41.73
  Top 2.54: R4.1 68.58,41.73
N$7
  Top 0.406: SINGLE_GD2.1 112.78,53.09 110.49,50.8 R5.2
N$8
  Top 0.406: R6.2 106.26,55.46 107.95,57.15 109.48,57.15 SINGLE_GD2.3
N$9
  Top 2.54: L2.P$1 69.59,85.09 R11.2
  Bottom 0.254: U$12.4 92.71,86.36 91.44,86.36
  Bottom 2.54: 91.44,86.36 84.4,93.4 U$10.4 75.56,87.68 L2.P$1
N$10
  Bottom 1.27: I_SENSE_3.OUT6 I_SENSE_3.OUT7
  Bottom 2.54: AC_OUT_2.1 136.95,21.38 140.97,25.4 140.97,40.64 137.16,44.45 132.08,44.45 130.81,43.18 130.81,42.16 I_SENSE_3.OUT6
N$11
  Top 2.54: R11.1 68.58,75.51 C13.A
N$12
  Top 0.406: R12.2 109.22,106.68 110.49,107.95 ACPL_W346.1
N$13
  Top 0.406: R13.2 107.7,110.49 ACPL_W346.3
N$14  (via drill 0.6)
  Top 0.406: ADUM_3220.7 104.78,60.33 106.05,60.33 106.68,60.96 106.68,62.23 106.68,64.77 106.68,66.04 105.41,67.31 v104.14,67.31
  Bottom 0.406: v104.14,67.31 104.14,69 R9.1
N$15
  Top 0.406: U$15.2 U$15.1 77.52,111.94 R18.1
N$16
  Bottom 0.254: U$19.14/A0 49.53,87.63 R34.2
N$17
  Top 0.406: U$15.11 85.09,121.74 | 85.09,121.74 U$15.10 | R22.1 87.76,124.46 87.63,124.46 86.36,124.46 85.09,123.19 85.09,121.74
N$18
  Bottom 0.254: U$19.15/A1 49.53,90.17 R33.2
N$19
  Top 0.406: R20.1 84.45,106.89 U$15.6 U$15.7
N$20
  Bottom 0.254: U$19.16/A2 49.53,92.71 R32.2
N$21
  Bottom 0.254: U$19.17/A3 49.53,95.25 54.61,95.25 55.88,96.52 R31.2
N$23  (via drill 0.6)
  Top 0.406: v104.14,74.93 104.14,71.12 107.95,67.31 107.95,60.96 107.95,59.94 107.19,59.18 107.06,59.05 ADUM_3220.6
  Bottom 0.406: v104.14,74.93 102.87,76.2 102.02,76.2 R10.1
N$24  (via drill 0.6)
  Top 0.406: v102.19,17.1 102.62,16.68 102.87,16.42 102.87,10.16 103,10.03 103.63,9.4 104.6,9.4 DUAL_GD2.7
  Bottom 0.406: 101.56,17.74 v102.19,17.1 101.56,17.74 | 101.56,17.74 R2.1
N$25
  Bottom 0.254: U$19.18/A4 48.01,96.27 53.85,96.27 56.64,99.06 R30.2
N$26  (via drill 0.6)
  Top 0.406: DUAL_GD2.6 102.23,8.26 v101.6,8.89
  Bottom 0.406: v101.6,8.89 101.6,10.16 92.71,19.05 92.71,20.49 R3.1
N$27
  Bottom 0.254: U$19.19/A5 46.23,97.03 53.34,97.03 57.91,101.6 R29.2
N$41  (via drill 0.6)
  Top 0.254: v58.67,106.43 58.93,106.68 R35.2
  Bottom 0.254: v58.67,106.43 56.39,104.14 56.39,101.35 56.39,100.84 55.88,100.33 53.34,97.79 44.45,97.79 U$19.20/A6
N$55
  Top 0.254: R42.2 55.88,102.87 53.34,100.33 48.26,100.33 45.72,102.87 45.72,111.76 38.1,119.38 36.83,120.65 U$17.75
N$56
  Top 0.254: U$17.73 36.83,118.11 44.45,110.49 | 44.45,110.49 44.45,109.22 | 44.45,110.49 44.45,101.6 46.99,99.06 54.61,99.06 55.88,100.33 R43.2
N$57
  Top 0.254: U$17.71 35.56,115.57 43.18,107.95 43.18,102.87 43.18,100.33 45.72,97.79 R44.2
N$58
  Top 0.254: U$17.69 34.29,113.03 41.91,105.41 41.91,99.06 46.99,93.98 R45.2
N$59
  Top 0.254: U$17.67 33.02,110.49 40.64,102.87 40.64,96.52 45.72,91.44 R46.2
N$60
  Top 0.254: U$17.65 31.75,107.95 39.37,100.33 39.37,95.25 45.72,88.9 R47.2
N$61  (via drill 0.6)
  Top 0.254: U$17.70 2.54,113.03 1.27,111.76 1.27,110.49 1.27,100.33 2.54,99.06 13.97,99.06 15.24,97.79 | v59.69,109.22 R48.2
  Top 0.406: 15.24,97.79 22.86,97.79 27.94,102.87 29.21,104.14 33.02,104.14 35.56,101.6 35.56,100.33 v36.83,99.06
  Bottom 0.254: v36.83,99.06 53.34,99.06 55.88,101.6 55.88,105.41 v59.69,109.22
PWM_H1  (via drill 0.6)
  Top 0.254: v100.33,113.03 102.87,110.49 R13.1
  Bottom 0.254: U$19.2 20.32,96.52 20.32,109.22 35.56,124.46 44.45,124.46 45.72,125.73 U$17.60 50.8,128.27 57.15,128.27 73.66,128.27 76.2,130.81 96.52,130.81 100.33,127 v100.33,113.03
PWM_H2
  Top 0.406: R6.1 73.66,53.34 66.04,60.96 63.5,63.5 62.23,64.77 49.53,64.77 48.26,63.5 U$17.40 40.64,69.85 28.45,69.85 28.19,70.1 19.56,78.74 U$19.8
PWM_L1+  (via drill 0.6)
  Top 0.254: ADUM_3220.2 98.86,60.2 96.27,60.2 95.5,59.44 v92.46,59.44 | U$19.5 21.59,86.36 25.4,82.55 50.29,82.55 73.41,59.44 77.22,59.44 v77.47,59.69
  Bottom 0.254: U$19.5 22.86,91.44 22.86,95.25 22.86,107.95 38.1,123.19 U$17.58 | v77.47,59.69 92.2,59.69 v92.46,59.44
PWM_L1-  (via drill 0.6)
  Top 0.254: ADUM_3220.3 98.86,58.93 97.03,58.93 95.76,57.66 v91.95,57.66 | U$19.6 19.05,83.82 30.48,72.39 57.4,72.39 70.87,58.93 72.14,57.66 79.5,57.66 v80.01,57.15
  Bottom 0.254: U$19.6 25.4,91.44 25.4,106.68 39.37,120.65 U$17.56 | v80.01,57.15 91.44,57.15 v91.95,57.66
PWM_L2+  (via drill 0.6)
  Top 0.406: DUAL_GD2.3 98.68,8.26 98.55,8.38 97.28,8.38 95.25,10.41 95.25,11.43 93.22,13.46 93.22,13.72 93.22,26.16 77.47,41.91 77.47,44.45 71.12,50.8 68.58,53.34 63.5,53.34 59.69,49.53 59.69,36.83 55.88,33.02 45.72,33.02 43.18,35.56 v43.18,49.53 | U$19.9 19.05,76.2 30.48,64.77 30.48,63.5 31.75,62.23 45.72,62.23 U$17.38
  Bottom 0.406: v43.18,49.53 43.18,57.15 45.72,59.69 U$17.38
PWM_L2-
  Top 0.254: U$19.10 31.75,59.69 36.83,59.69 39.37,57.15 46.99,57.15
  Top 0.406: DUAL_GD2.2 98.93,9.53 98.81,9.4 98.04,9.4 96.27,11.18 96.27,11.94 94.49,13.72 94.49,13.97 94.49,26.67 94.49,30.32 69.36,55.45 | 69.36,55.45 66.55,58.67 65.53,59.69 58.42,59.69 57.15,58.42 57.15,57.15 57.15,36.83 54.61,34.29 46.99,34.29 45.09,36.2 45.09,56.52 45.72,57.15 46.99,57.15 U$17.36 | 68.93,55.88 69.36,55.45
TEMP  (via drill 0.6)
  Top 0.406: LMT_87.OUT 85.6,133.22 85.6,132.59 85.09,132.08 83.82,130.81 C25.2 82.13,127.93 v82.3,127.76 | R48.1 62.88,107.95 | 62.88,107.95 R35.1 | v68.58,109.22 67.56,109.22 66.8,108.46 63.39,108.46 62.88,107.95
  Bottom 0.406: v82.3,127.76 82.3,122.94 v68.58,109.22
V_APP1  (via drill 0.6)
  Top 0.254: DZ1.1 64.77,96.64 64.77,97.79 v64.77,98.81 64.77,99.57 64.26,100.08 60.59,100.08 R43.1
  Top 0.406: R17.1 R18.2 76.2,106.55 76.2,102.87 76.2,100.33 71.54,95.67 C22.1 69.55,95.37 DZ1.1 65.92,95.25
  Bottom 0.254: v64.77,98.81 64.26,99.31 60.59,99.31 R30.1
V_APP2  (via drill 0.6)
  Top 0.254: 65.92,90.17 DZ2.1 65.92,90.29 63.75,92.46 63.75,95.76 62.99,96.52 62.61,96.9 | R44.1 60.59,97.54 61.98,97.54 62.61,96.9 | v62.23,96.52 62.61,96.9
  Top 0.406: C23.1 69.55,90.29 DZ2.1 65.92,90.17 | C23.1 70.27,90.17 | C23.1 69.94,90.68 71.63,90.68 77.98,97.03 77.98,101.35 79.76,103.12 80.26,103.12 v80.52,103.38 | v86.87,105.41 87.63,105.41 89.79,107.57 R19.1 R20.2
  Bottom 0.254: R31.1 v62.23,96.52
  Bottom 0.406: v86.87,105.41 82.55,105.41 v80.52,103.38
V_MAIN  (via drill 0.6)
  Top 0.254: 64.77,105.16 63.63,104.01 | 63.63,104.01 62.48,102.87 R42.1 | 69.85,105.41 71.12,106.68 71.12,107.95 v78.74,115.57 | v62.23,101.6 63.63,103 63.63,104.01
  Top 0.406: R22.2 R21.1 87.25,116.46 v86.36,115.57 | 69.85,105.41 DZ3.1 66.34,105.29 C24.1 65.87,105.16 64.77,105.16
  Bottom 0.254: R29.1 v62.23,101.6
  Bottom 0.406: v86.36,115.57 v78.74,115.57
VBUS
  Top 0.406: R21.2 93.34,113.66 93.98,114.3 I_SENSE_1.OUT6
  Top 2.54: I_SENSE_1.OUT9 I_SENSE_1.OUT6
  Bottom 0.254: 92.71,105.41 U$11.4
  Bottom 0.406: I_SENSE_1.OUT9 I_SENSE_1.OUT8 I_SENSE_1.OUT7
  Bottom 2.54: I_SENSE_1.OUT9 I_SENSE_1.OUT8 I_SENSE_1.OUT7 93.98,116.84 93.98,107.26 U$11.4 | U$5.4 79.43,52.65 69.85,62.23 69.85,96.52 77.47,104.14 81.28,107.95 90.17,107.95 92.71,105.41
VOUT1
  Top 0.254: L2.P$2 105.41,85.09 | 111.76,72.39 110.49,72.39
  Top 0.406: R17.2 81.28,106.68 81.28,105.41 87.63,99.06 101.6,85.09 102.87,85.09 L2.P$2 105.41,85.09
  Top 1.27: 111.76,72.82 111.76,72.39
  Top 2.184: 111.12,71.75 111.76,72.39
  Top 2.54: I_SENSE_2.IN2 117.09,82.8 111.76,77.47 111.76,73.66 111.76,72.82 | R14.2 128.52,63.25 125.73,66.04 120.65,66.04 115.57,71.12 114.3,72.39 111.76,72.39 111.33,72.39 C8.+
  Bottom 0.406: 116.84,86.36 116.84,86.61 I_SENSE_2.IN3
  Bottom 2.54: L2.P$2 116.33,85.09 | 116.33,85.09 I_SENSE_2.IN2 | 116.33,85.09 116.33,85.85 116.84,86.36
VOUT2  (via drill 0.6)
  Top 0.406: v106.68,78.74 109.22,81.28 109.22,86.36 102.87,92.71 102.87,96.4 R19.2
  Top 1.27: R7.2 124.21,10.16 111.76,10.16 106.68,15.24 106.68,16.51 106.68,20.32 v108.58,22.22 C5.+
  Bottom 0.406: 118.11,35.56 118.11,36.58 I_SENSE_3.IN3 | I_SENSE_3.IN2 118.11,34.29 | v106.68,78.74 106.68,36.2 L1.P$2
  Bottom 1.27: v108.58,22.22 118.11,31.75 118.11,35.56
  Bottom 2.54: L1.P$2 118.11,35.56 118.11,34.29
VOUT_H1
  Top 0.406: SINGLE_GD2.5 111.51,44.54 R1.2
VOUT_H2
  Top 0.406: ACPL_W346.5 R8.2

## Text on the board
tDocu: v_sense
bDocu: I_sense